# Altium PCB PCB1.PcbDoc
Units mm, origin at the board's own origin, x right, y up, seen from the top; angles counter-clockwise.
Board outline 99.69 x 59.21 mm, 2 copper layers (Top Layer, Bottom Layer), stack 0.771 mm thick; 143 components, 84 nets, 366 pads, 493 vias.
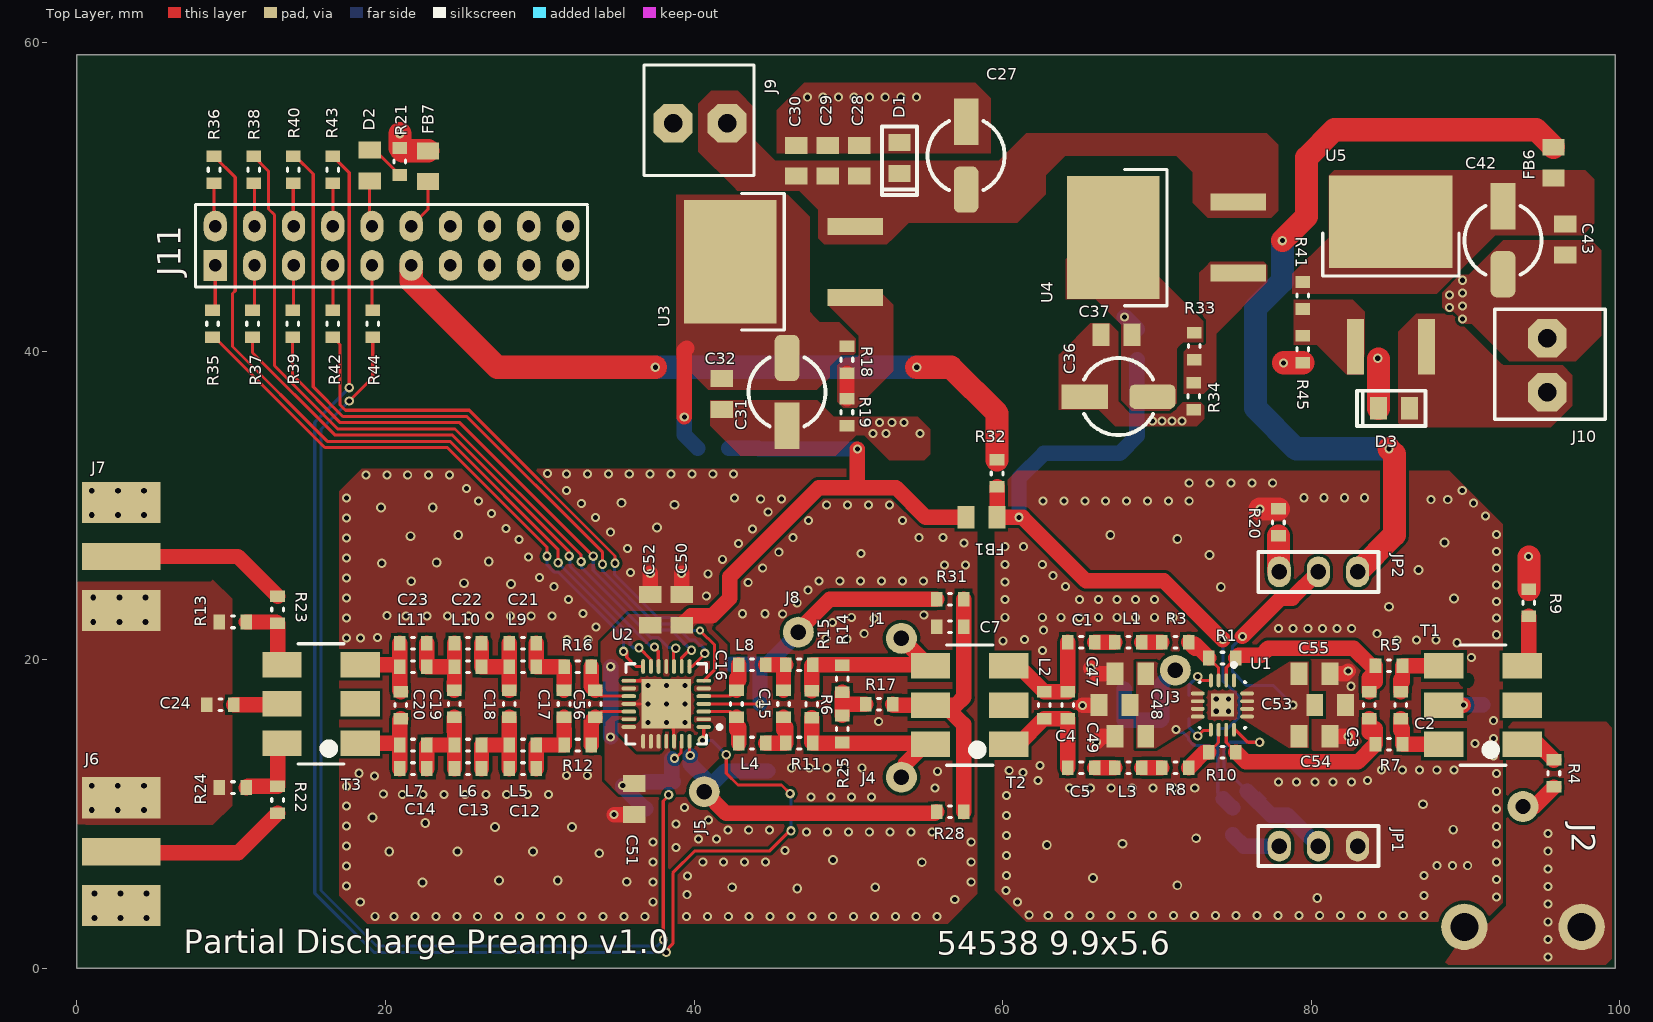
[diagram p0: Top Layer view]
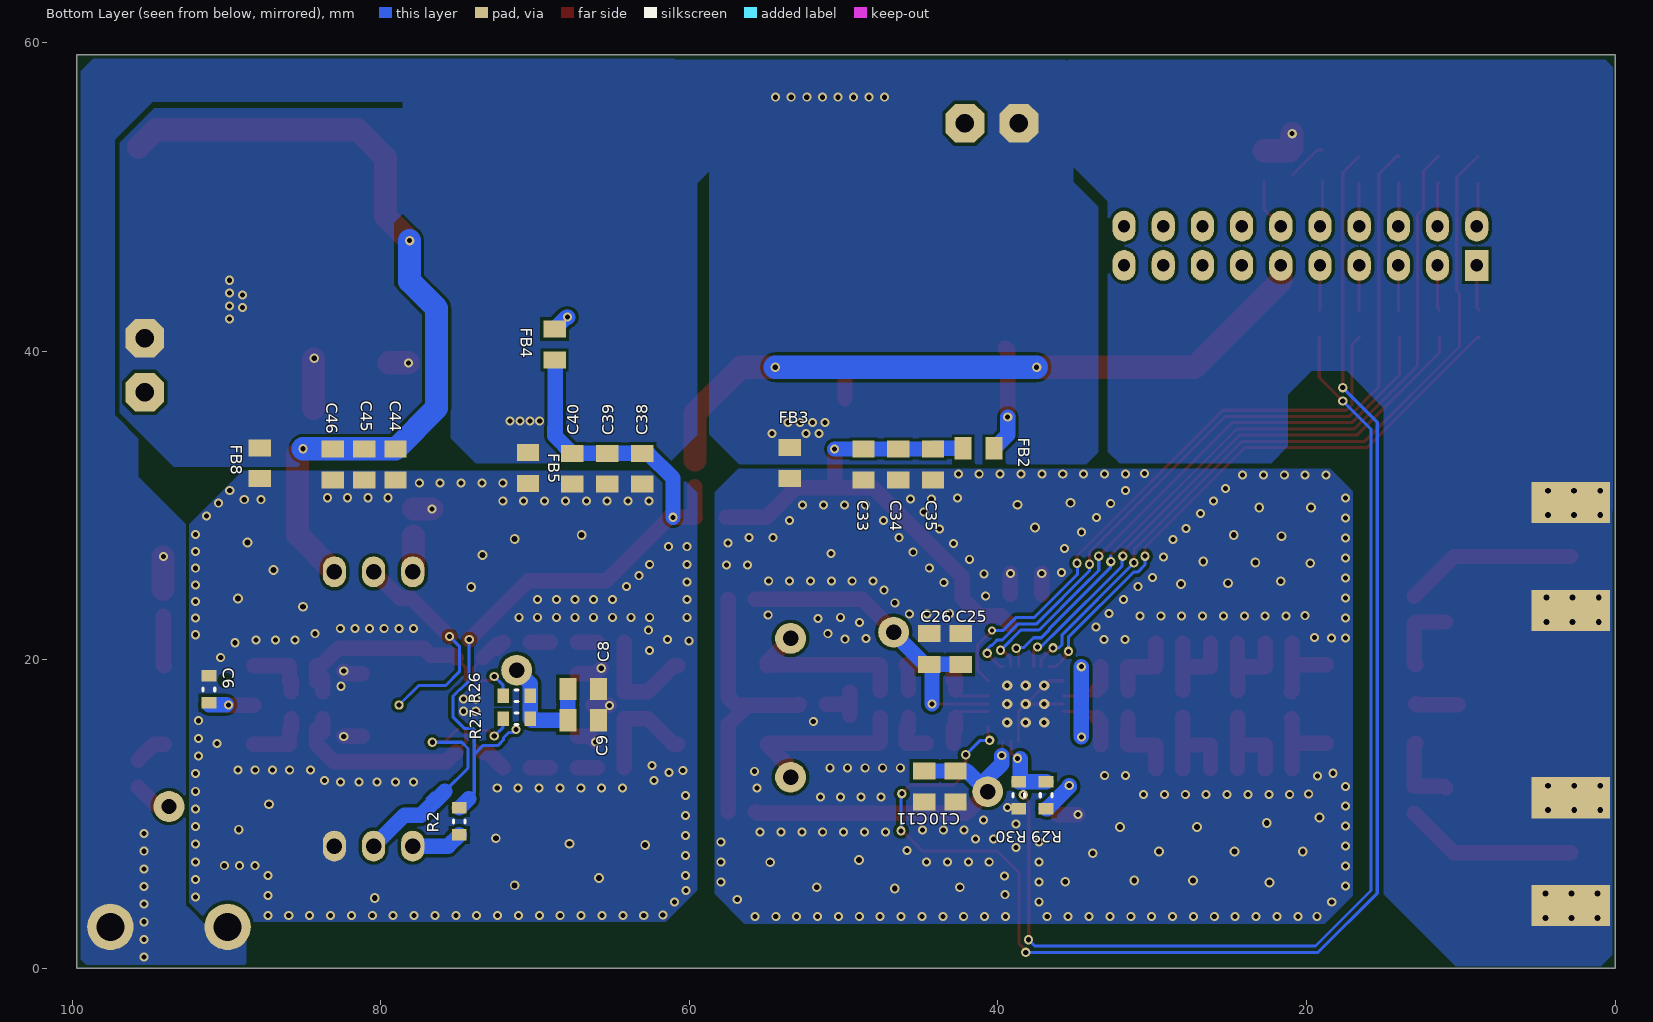
[diagram p1: Bottom Layer view, seen from below]
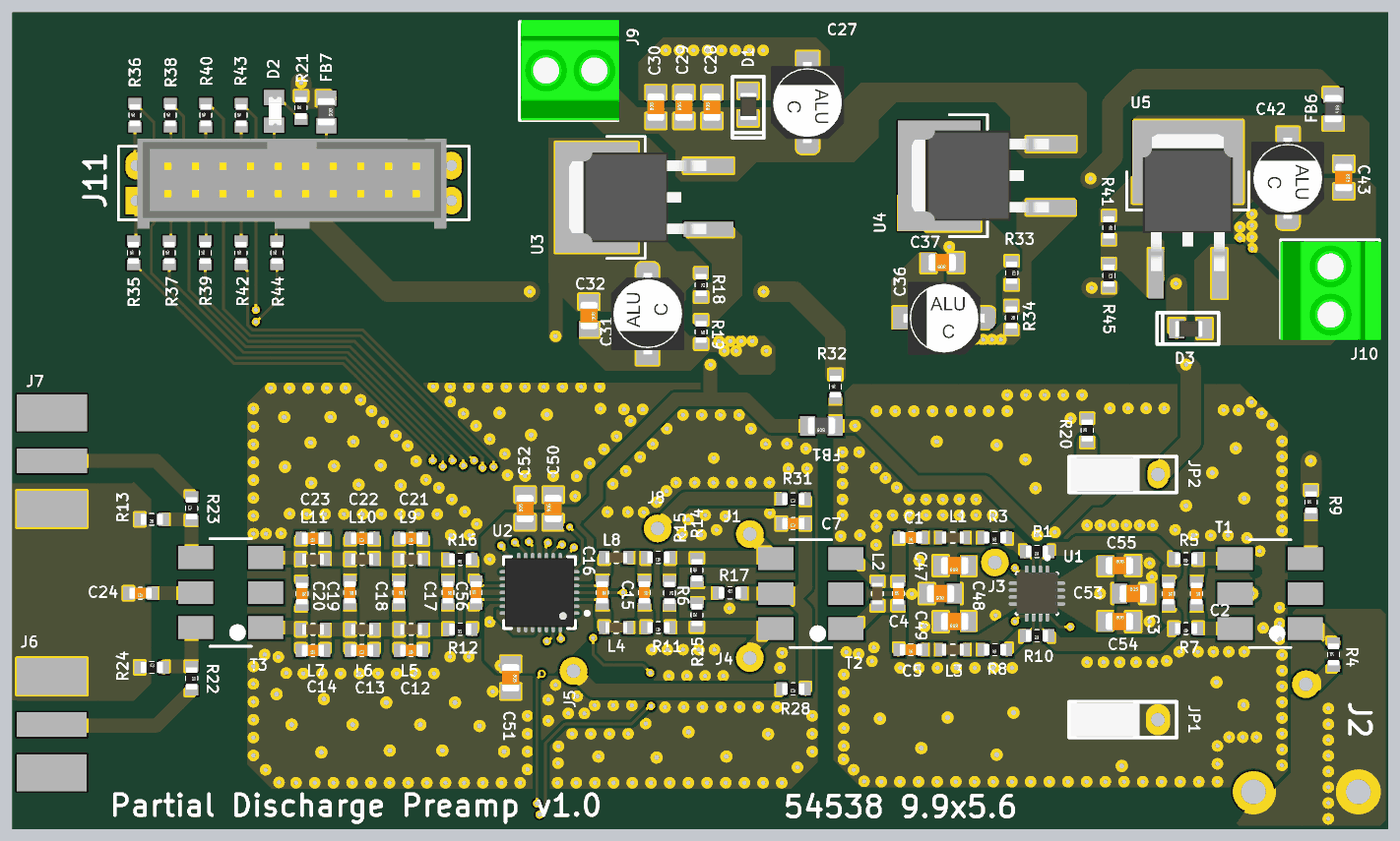
[diagram p2: 3D render of the assembled board from above, using the file's embedded part models]
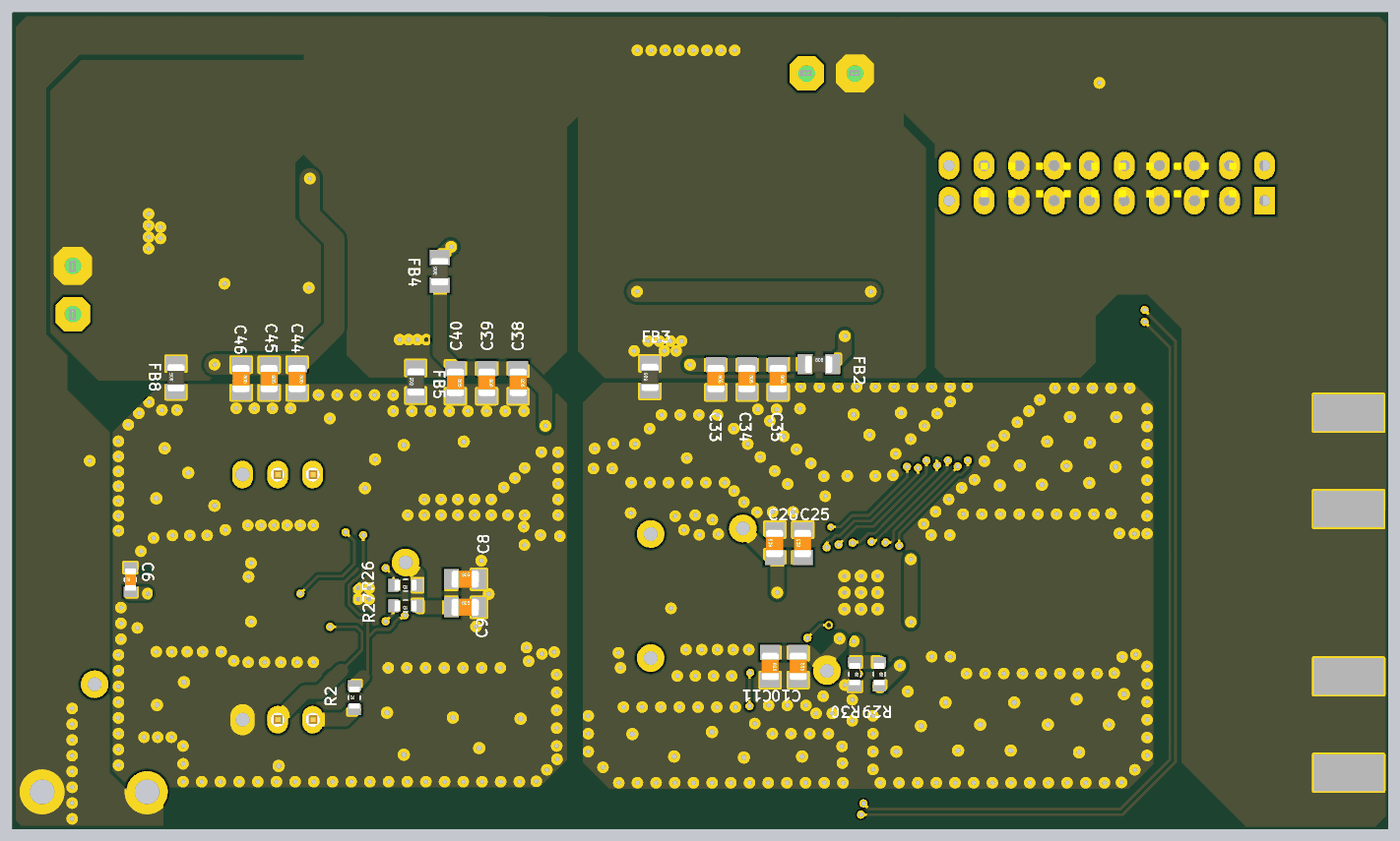
[diagram p3: 3D render of the assembled board from below, using the file's embedded part models]

## Layer stack, top to bottom
Top Layer: signal copper 0.0356
Dielectric: core 0.7, FR-4, Dk 4.8
Bottom Layer: signal copper 0.0356

## Board outline
0,0 0,59.207 99.695,59.207 99.695,0

## Design rules (kind name [scope] priority, off if disabled: settings)
Clearance [InNetClass('AMP1') vs InNamedPolygon('TOP_IMP_GND1')] p1: gap=0.203
Clearance Clearance_2 [InNetClass('AMP2') vs InNamedPolygon('TOP_GND_POLY')] p2: gap=0.203
Clearance Clearance_1 [All] p3: gap=0.203
HoleSize [All] p1: absolutevalues=TRUE maxlimit=2.54 minlimit=0.254 maxpercent=80.000 minpercent=20.000
MinimumSolderMaskSliver [All] p1: minsoldermaskwidth=0.127
PlaneConnect [All] p1: planeconnectstyle=Direct reliefexpansion=0.508 reliefentries=4 reliefconductorwidth=0.254 reliefairgap=0.254
PolygonConnect [All] p1: connectstyle=Direct reliefconductorwidth=0.254 reliefentries=4 polygonreliefangle="90 Angle"
RoutingVias [All] p1: holewidth=0.254 width=0.508 viastyle="Through Hole" minholewidth=0.254 minwidth=0.508 maxholewidth=1.27 maxwidth=1.397
SilkToSilkClearance [All] p1: silktosilkclearance=0.152
SilkscreenOverComponentPads [All] p1: minsilkscreentomaskgap=0.152
SolderMaskExpansion SolderMaskExpansion_1 [(IsVia)] p1: expansion=-1.27
SolderMaskExpansion [All] p2: expansion=0.127
Width [All] p1: maxlimit=1.778 minlimit=0.152 preferedwidth=0.254
23 further rules are at their usual default settings.

## Classes and differential pairs
component class Sheet_Amp_1: C1 C2 C3 C4 C5 C6 C7 C8 C9 C10 C11 C12 C13 C14 C15 C16 C17 C18 C19 C20 C21 C22 C23 C24 C25 C26 C47 C48 C49 C50 C51 C52 C53 C54 C55 C56 J1 J2 J3 J4 J5 J6 J7 J8 JP1 L1 L2 L3 L4 L5 L6 L7 L8 L9 L10 L11 R1 R2 R3 R4 R5 R6 R7 R8 R9 R10 R11 R12 R13 R14 R15 R16 R17 R22 R23 R24 R25 R26 R27 R28 R29 R30 R31 T1 T2 T3 U1 U2
component class Sheet_power_1: C27 C28 C29 C30 C31 C32 C33 C34 C35 C36 C37 C38 C39 C40 C42 C43 C44 C45 C46 D1 D2 D3 FB1 FB2 FB3 FB4 FB5 FB6 FB7 FB8 J9 J10 J11 JP2 R18 R19 R20 R21 R32 R33 R34 R35 R36 R37 R38 R39 R40 R41 R42 R43 R44 R45 U3 U4 U5

## Components (designator, comment, footprint, x,y, rotation, side; value= is the part's Value field where it differs from the comment)
C1 "C" C_0603 65.1,21.133 r180 top
C2 "C" C_0603 85.801,17.069 r270 top
C3 "TEST" C_0603 83.769,17.069 r270 top
C4 "C" C_0603 64.211,17.069 r90 top
C5 "C" C_0603 65.1,13.005 r180 top
C6 "C" C_0603 91.135,18.085 r90 bottom
C7 "C" C_0603 56.591,22.149 r180 top
C8 "C" C_0805 66.878,18.11 r180 bottom
C9 "C" C_0805 66.878,16.078 r180 bottom
C10 "C" C_0805 42.748,11.795 r270 bottom
C11 "C" C_0805 44.78,11.795 r270 bottom
C12 "C" C_0603 28.905,12.954 r180 top
C13 "C" C_0603 25.349,12.954 r180 top
C14 "C" C_0603 21.793,12.954 r180 top
C15 "C" C_0603 45.796,17.145 r270 top
C16 "C" C_0603 42.748,17.145 r270 top
C17 "C" C_0603 31.572,17.145 r270 top
C18 "C" C_0603 28.016,17.145 r270 top
C19 "C" C_0603 24.46,17.145 r270 top
C20 "C" C_0603 20.993,17.069 r270 top
C21 "C" C_0603 28.905,21.082 r180 top
C22 "C" C_0603 25.349,21.082 r180 top
C23 "C" C_0603 21.793,21.082 r180 top
C24 "C" C_0603 9.296,17.094 r180 top
C25 "C" C_0805 42.418,20.701 r90 bottom
C26 "C" C_0805 44.45,20.701 r90 bottom
C27 "CPOL" "C_SMD_5.0 X 5.4" 57.633,52.68 r270 top
C28 "C" C_0805 50.698,52.349 r90 top
C29 "C" C_0805 48.666,52.349 r90 top
C30 "C" C_0805 46.634,52.349 r90 top
C31 "CPOL" "C_SMD_5.0 X 5.4" 46.025,37.363 r90 top
C32 "C" C_0805 41.783,37.236 r270 top
C33 "C" C_0805 48.717,32.664 r270 bottom
C34 "C" C_0805 46.463,32.664 r270 bottom
C35 "C" C_0805 44.209,32.664 r270 bottom
C36 "CPOL" "C_SMD_5.0 X 5.4" 67.513,37.059 r0 top
C37 "C" C_0805 67.386,41.072 r180 top
C38 "C" C_0805 63.043,32.385 r270 bottom
C39 "C" C_0805 65.316,32.385 r270 bottom
C40 "C" C_0805 67.589,32.385 r270 bottom
C42 "CPOL" "C_SMD_5.0 X 5.4" 92.431,47.193 r270 top
C43 "C" C_0805 96.469,47.244 r270 top
C44 "C" C_0805 79.045,32.664 r270 bottom
C45 "C" C_0805 81.077,32.664 r270 bottom
C46 "C" C_0805 83.109,32.664 r270 bottom
C47 "C" C_0805 68.275,19.101 r180 top
C48 "C" C_0805 67.259,17.069 r180 top
C49 "C" C_0805 68.275,15.037 r180 top
C50 "C" C_0805 39.192,23.241 r90 top
C51 "C" C_0805 36.119,10.973 r270 top
C52 "C" C_0805 37.16,23.241 r90 top
C53 "C" C_0805 81.229,17.069 r0 top
C54 "C" C_0805 80.213,15.037 r0 top
C55 "C" C_0805 80.213,19.101 r0 top
C56 "C" C_0603 33.604,17.145 r90 top
D1 "D" DZENER_0805 53.315,52.527 r90 top
D2 "LED" LED_0805 18.974,52.04 r90 top
D3 "D" DZENER_0805 85.369,36.297 r0 top
FB1 "Ferrita" R_0805 58.623,29.235 r180 top
FB2 "Ferrita" R_0805 41.25,33.706 r180 bottom
FB3 "Ferrita" R_0805 53.492,32.766 r90 bottom
FB4 "Ferrita" R_0805 68.732,40.437 r90 bottom
FB5 "Ferrita" R_0805 70.46,32.432 r90 bottom
FB6 "Ferrita" R_0805 95.707,52.222 r270 top
FB7 "Ferrita" R_0805 22.758,51.993 r270 top
FB8 "Ferrita" R_0805 87.833,32.741 r90 bottom
J1 "TEST POINT" TEST_POINT 53.442,21.387 r0 top
J2 "Input" BNC 93.726,2.692 r180 top
J3 "TEST POINT" TEST_POINT 71.196,19.329 r180 top
J4 "TEST POINT" TEST_POINT 53.442,12.395 r0 top
J5 "TEST POINT" TEST_POINT 40.665,11.455 r0 top
J6 "Output" SMA 2.87,7.569 r270 top
J7 "Output" SMA 2.874,26.695 r90 top
J8 "TEST POINT" TEST_POINT 46.761,21.793 r0 top
J9 "Power VS+" BORNA_PT_2 40.386,54.788 r270 top
J10 "Power VS-" BORNA_PT_2 95.301,39.091 r180 top
J11 "Header 2x10" PINS_10_DOBLE 8.966,45.568 r90 top
JP1 "SHUNT" JUMPER_2,54_3 80.467,7.925 r0 top
JP2 "SHUNT" JUMPER_2,54_3 80.467,25.705 r0 top
L1 "L" L_0603 68.148,21.133 r180 top
L2 "TEST" L_0603 62.687,17.069 r270 top
L3 "L" L_0603 68.148,13.005 r180 top
L4 "L" L_0603 43.764,14.605 r180 top
L5 "L" L_0603 28.905,14.478 r180 top
L6 "L" L_0603 25.349,14.478 r180 top
L7 "L" L_0603 21.793,14.478 r180 top
L8 "L" L_0603 43.764,19.685 r180 top
L9 "L" L_0603 28.905,19.558 r180 top
L10 "L" L_0603 25.349,19.558 r180 top
L11 "L" L_0603 21.793,19.558 r180 top
R1 "R" R_0603 74.244,20.117 r180 top
R2 "R" R_0603 74.905,9.525 r90 bottom
R3 "R" R_0603 71.196,21.133 r180 top
R4 "TEST" R_0603 95.733,12.649 r90 top
R5 "R" R_0603 85.039,19.609 r180 top
R6 "TEST" R_0603 47.625,17.12 r270 top
R7 "R" R_0603 85.039,14.529 r180 top
R8 "R" R_0603 71.196,13.005 r180 top
R9 "TEST" R_0603 94.107,23.698 r90 top
R10 "R" R_0603 74.244,14.021 r180 top
R11 "TEST" R_0603 46.812,14.605 r180 top
R12 "R" R_0603 32.461,14.478 r180 top
R13 "TEST" R_0603 10.109,22.454 r180 top
R14 "TEST" R_0603 49.606,18.771 r90 top
R15 "TEST" R_0603 46.812,19.685 r180 top
R16 "R" R_0603 32.461,19.558 r180 top
R17 "TEST" R_0603 51.994,17.12 r0 top
R18 "R" R_0603 49.911,39.446 r270 top
R19 "R" R_0603 49.911,36.043 r270 top
R20 "R" R_0603 77.876,28.905 r90 top
R21 "R" R_0603 20.93,52.299 r90 top
R22 "TEST" R_0603 13.005,10.922 r270 top
R23 "TEST" R_0603 13.005,23.254 r90 top
R24 "TEST" R_0603 10.109,11.722 r0 top
R25 "TEST" R_0603 49.606,15.519 r90 top
R26 "R" R_0603 71.196,17.678 r0 bottom
R27 "R" R_0603 71.196,16.18 r0 bottom
R28 "TEST" R_0603 56.591,10.16 r180 top
R29 "" R_0603 36.881,11.227 r270 bottom
R30 "" R_0603 38.659,11.227 r270 bottom
R31 "TEST" R_0603 56.591,23.935 r180 top
R32 "R" R_0603 59.639,32.08 r90 top
R33 "R" R_0603 72.415,40.335 r270 top
R34 "R" R_0603 72.39,37.084 r270 top
R35 "R" R_0603 8.788,41.783 r90 top
R36 "R" R_0603 8.89,51.765 r90 top
R37 "R" R_0603 11.386,41.783 r90 top
R38 "R" R_0603 11.455,51.765 r90 top
R39 "R" R_0603 13.983,41.783 r90 top
R40 "R" R_0603 14.021,51.765 r90 top
R41 "R" R_0603 79.451,43.612 r270 top
R42 "R" R_0603 16.58,41.783 r90 top
R43 "R" R_0603 16.586,51.765 r90 top
R44 "R" R_0603 19.177,41.783 r90 top
R45 "R" R_0603 79.451,40.132 r270 top
T1 "Transformer_center_tab" TRASFORMADOR_2.54 91.135,17.069 r180 top
T2 "Transformer_center_tab" TRASFORMADOR_2.54 57.861,17.069 r180 top
T3 "Transformer_center_tab" TRASFORMADOR_2.54 15.824,17.145 r180 top
U1 "THS4509" QFN_16 74.244,17.069 r270 top
U2 "PGA870" QFN_28 38.202,17.145 r180 top
U3 "VOLTAGE_REGULATOR_3" REG_DPAK 44.348,45.796 r180 top
U4 "VOLTAGE_REGULATOR_3" REG_DPAK 69.164,47.371 r180 top
U5 "VOLTAGE_REGULATOR_3" REG_DPAK 85.166,46.38 r90 top

## Footprints (in the part's own frame and the unit in brackets; to place one, negate y for a bottom-side part, rotate by r counter-clockwise, add the part's x,y. Pads: shape width x height; smd on the part's side, far side on the other; paste and mask are expansions set on the pad)
BNC [mm]
  round 2 hole 1: 1(0,-7.8)
  round 3 hole 1.8: 2(-3.8,0) 2(3.8,0)
BORNA_PT_2 [mm]
  oct 2.5x2.5 hole 1.2: 1(0,1.75) 2(0,-1.75)
  silkscreen extent -3.76,-3.63 3.4,3.5, body extent -3.86,-3.51 3.43,3.6, height 8.51
C_0603 [mm] "Chip Resistor, 2-Leads, Body 1.6x0.8mm, IPC Medium Density"
  rect 0.75x0.95 smd: 1(-0.875,0) 2(0.875,0)
  silkscreen extent -0.1,-0.38 0.1,0.38, body extent -0.8,-0.4 0.8,0.4, height 0.3
C_0805 [mm] "Chip Capacitor, 2-Leads, Body 2,0x1,3mm, IPC Medium Density"
  rect 1.1x1.45 smd: 1(-1,0) 2(1,0)
  body extent -1,-0.63 1,0.63, height 0.78
"C_SMD_5.0 X 5.4" [mm]
  rect 3x1.6 smd: 1(-2.2,0)
  rrect50% 3x1.6 smd: 2(2.2,0)
  silkscreen extent -2.24,-2.5 2.24,2.5, body extent -2.95,-2.67 2.95,2.63, height 5.41
DZENER_0805 [mm]
  rect 1.1x1.45 smd: A(1,0) K(-1,0)
  silkscreen extent -2.41,-1.14 2.03,1.14, body extent -1.13,-0.64 0.87,0.57, height 1.22
JUMPER_2,54_3 [mm]
  oval 1.5x2 hole 1: 1(-2.54,0) 2(0,0) 3(2.54,0)
  silkscreen extent -3.9,-1.3 3.9,1.3, body extent -3.8,-1.27 1.2,1.27, height 9.5
L_0603 [mm] "Chip Resistor, 2-Leads, Body 1.6x0.8mm, IPC Medium Density"
  rect 0.75x0.95 smd: 1(-0.875,0) 2(0.875,0)
  silkscreen extent -0.1,-0.38 0.1,0.38, body extent -0.8,-0.4 0.8,0.4, height 0.8
LED_0805 [mm]
  rect 1.1x1.45 smd: A(-1,0) K(1,0)
  body extent -1.03,-0.53 1.03,0.38, height 0.85
PINS_10_DOBLE [mm]
  rect 2x1.5 hole 0.8: 1(0,0)
  oval 2x1.5 hole 0.8: 2(2.54,0) 3(0,-2.54) 4(2.54,-2.54) 5(0,-5.08) 6(2.54,-5.08) 7(0,-7.62) 8(2.54,-7.62) 9(0,-10.16) 10(2.54,-10.16) 11(0,-12.7) 12(2.54,-12.7) 13(0,-15.24) 14(2.54,-15.24) 15(0,-17.78) 16(2.54,-17.78) 17(0,-20.32) 18(2.54,-20.32) 19(0,-22.86) 20(2.54,-22.86)
  silkscreen extent -1.4,-24.13 3.94,1.27, body extent -2.03,-22.49 4.51,-0.11, height 4.41
QFN_16 [mm] "QFN, 16-Leads, Body 2.8x2.8mm (max), Pitch 0.50mm, IPC Medium Density"
  oval 0.9x0.25 smd mask+0: 1(-1.6,0.75) 2(-1.6,0.25) 3(-1.6,-0.25) 4(-1.6,-0.75) 9(1.6,-0.75) 10(1.6,-0.25) 11(1.6,0.25) 12(1.6,0.75)
  oval 0.25x0.9 smd mask+0: 5(-0.75,-1.6) 6(-0.25,-1.6) 7(0.25,-1.6) 8(0.75,-1.6) 13(0.75,1.6) 14(0.25,1.6) 15(-0.25,1.6)
  oval 0.25x0.9 smd paste+0 mask+0: 16(-0.75,1.6)
  rect 1.5x1.5 smd mask+0: 17(0,0)
  silkscreen extent -2.72,-1.53 1.53,1.52, body extent -1.54,-1.5 1.5,1.54, height 0.9
QFN_28 [mm] "QFN, 28-Leads, Body 5.2x5.2mm (max), Pitch 0.50mm, IPC Medium Density"
  oval 0.95x0.25 smd mask+0: 1(-2.425,1.5) 2(-2.425,1) 3(-2.425,0.5) 4(-2.425,0) 5(-2.425,-0.5) 6(-2.425,-1) 7(-2.425,-1.5) 15(2.425,-1.5) 16(2.425,-1) 17(2.425,-0.5) 18(2.425,0) 19(2.425,0.5) 20(2.425,1) 21(2.425,1.5)
  oval 0.25x0.95 smd mask+0: 8(-1.5,-2.425) 9(-1,-2.425) 10(-0.5,-2.425) 11(0,-2.425) 12(0.5,-2.425) 13(1,-2.425) 14(1.5,-2.425) 22(1.5,2.425) 23(1,2.425) 24(0.5,2.425) 25(0,2.425) 26(-0.5,2.425) 27(-1,2.425) 28(-1.5,2.425)
  rect 3.2x3.2 smd mask+0: 29(0,0)
  silkscreen extent -3.57,-2.6 2.6,2.6, body extent -2.52,-2.52 2.52,2.52, height 0.9
R_0603 [mm] "Chip Resistor, 2-Leads, Body 1.6x0.8mm, IPC Medium Density"
  rect 0.75x0.95 smd: 1(-0.875,0) 2(0.875,0)
  silkscreen extent -0.1,-0.38 0.1,0.38, body extent -0.8,-0.4 0.8,0.4, height 0.3
R_0805 [mm] "Chip Resistor Body 2,0x1,3mm, IPC Medium Density"
  rect 1.1x1.45 smd: 1(-1,0) 2(1,0)
  body extent -1.02,-0.64 0.98,0.62, height 0.78
REG_DPAK [mm]
  rect 3.6x1.1 smd: GND(-6.1,2.3) IN(-6.1,-2.3)
  rect 6x8 smd: OUT(2,0)
  silkscreen extent -1.5,-4.42 1.27,4.42, body extent -5.93,-3.28 4,3.26, height 2.34
SMA [mil]
  rect 70x200 smd: 1(0,0)
  rect 105x200 smd: 2(-137.5,0) 2(137.5,0)
  rect 105x200 smd far side: 2(-137.5,0) 2(137.5,0)
TEST_POINT [mm]
  round 2 hole 1: 1(0,0)
TRASFORMADOR_2.54 [mm] "SOP, 6-Leads, Body 7.8x5.6mm (max), Pitch 2.54mm, IPC Medium Density"
  rect 2.54x1.65 smd: 1(-2.54,2.54) 2(-2.54,0) 3(-2.54,-2.54) 4(2.54,-2.54) 5(2.54,0) 6(2.54,2.54)
  silkscreen extent -1.5,-3.9 1.5,3.9, body extent -2.8,-3.9 2.8,3.9, height 2.65

## Part data
C3: library part C
J9 J10: library part BORNA_2
L2: library part L
R4 R6 R9 R11 R13 R14 R15 R17 R22 R23 R24 R25 R28 R29 R30 R31: library part R

## Free pads (board coordinates)
  round 0.6 hole 0.333: 0(78.816,17.069)

## Via types
v1: diameter 0.584, hole 0.33, Top Layer to Bottom Layer, 354 vias
v2: diameter 0.635, hole 0.381, Top Layer to Bottom Layer, 70 vias
v3: diameter 0.6, hole 0.333, Top Layer to Bottom Layer, 54 vias
v4: diameter 0.66, hole 0.33, Top Layer to Bottom Layer, tented top, 9 vias
v5: diameter 0.6, hole 0.33, Top Layer to Bottom Layer, tented top, 4 vias
v6: diameter 0.6, hole 0.33, Top Layer to Bottom Layer, 1 vias
v7: diameter 0.508, hole 0.254, Top Layer to Bottom Layer, 1 vias

## Nets (pads, with @x,y where several pads share a name; then routed paths per layer and width w, separated by ;. In a path a pad name is that pad's centre, name@x,y a point inside that pad or via, vN(x,y) a via of type N, cw(c..) or ccw(c..) an arc to the next point about the centre after c; other vN are vias at no path point)
AMP1+: J4.1 R6.2 R11.1 R25.1 T2.6 | length 11.4
  Top Layer w1: R11.1@47.625,14.667 R6.2 ; R11.1 T2.6@54.885,14.605 ; J4.1@53.696,12.395 53.696,13.263 T2.6@54.961,14.529
AMP1-: J1.1 R6.1 R14.2 R15.1 T2.4 | length 11.4
  Top Layer w1: R6.1 47.625,19.623 R15.1 54.885,19.685 54.961,19.609 54.961,19.867 J1.1
B0: R35.1 U2.14 | length 38
  Top Layer w0.2: R35.1 8.915,40.908 16.067,33.757 24.009,33.757 30.464,27.302 v3(30.464,26.721) ; v3@35.636,20.574 35.636,20.168 36.234,19.57 U2.14@36.676,19.57
  Bottom Layer w0.2: v3(30.464,26.721) 30.464,26.163 30.941,25.686 31.21,25.686 35.433,21.463 v3(35.433,20.549)
B1: R36.2 U2.13 | length 49.8
  Top Layer w0.2: R36.2 10.262,51.269 10.262,43.917 10.084,43.739 10.084,40.31 16.234,34.16 24.176,34.16 31.191,27.145 v3(31.191,26.289) ; v3(36.424,20.777) 36.45,20.777 37.202,20.026 U2.13
  Bottom Layer w0.2: v3@31.214,26.252 35.836,21.63 35.836,20.998 36.057,20.777 v3(36.424,20.777)
B2: R37.1 U2.12 | length 36.9
  Top Layer w0.2: R37.1 11.386,39.913 16.735,34.563 24.343,34.563 31.902,27.004 v3(31.902,26.721) ; v3(37.44,20.828) 37.44,20.803 37.676,20.566 U2.12@37.676,19.57
  Bottom Layer w0.2: v3(31.902,26.721) 31.964,26.721 31.964,26.073 36.481,21.555 36.499,21.555 37.226,20.828 v3(37.44,20.828)
B3: R38.2 U2.10 | length 50.1
  Top Layer w0.2: R38.2 12.421,51.675 12.421,49.225 12.802,48.844 12.802,39.067 16.902,34.966 24.51,34.966 32.683,26.793 v3(32.683,26.366) ; U2.10@38.676,19.57 v3@38.676,20.617
  Bottom Layer w0.2: v3(32.683,26.366) 32.683,26.69 32.714,26.721 32.714,25.974 36.666,22.021 36.666,21.958 37.193,21.431 37.689,21.431 38.318,20.803 38.862,20.803 v3(38.811,20.752)
B4: R39.1 U2.9 | length 38
  Top Layer w0.2: R39.1 13.983,38.456 17.069,35.37 24.815,35.37 v3(33.464,26.721) v3@33.464,26.749 ; U2.9@39.176,19.57 39.176,20.101 39.853,20.777 39.853,20.65 v3(39.827,20.625)
  Bottom Layer w0.2: v3(33.464,26.721) 33.464,25.794 34.531,24.727 37.326,21.931 38.511,21.931 39.665,20.777 39.853,20.777 39.853,20.65 v3(39.827,20.625)
B5: R40.2 U2.8 | length 50.6
  Top Layer w0.2: R40.2 14.162,52.64 15.316,51.486 15.316,37.693 17.236,35.773 25.265,35.773 34.071,26.967 v3(34.071,26.192) ; U2.8@39.676,19.57 39.89,19.57 40.742,20.422 v3(40.691,20.422)
  Bottom Layer w0.2: v3(34.071,26.192) 34.071,25.757 37.493,22.335 38.678,22.335 39.739,21.274 40.08,21.274 40.08,21.252 40.4,20.933 40.475,20.933 40.767,20.641 40.767,20.447 40.742,20.422 v3(40.691,20.422)
CM: C7.1 R17.2 R28.1 R31.1 T2.5 | length 18.6
  Top Layer w1: R17.2 52.92,17.069 54.961,17.069 T2.5@56.21,17.069 ; R28.1 57.466,15.813 T2.5@56.21,17.069 ; R31.1 C7.1 57.466,17.591 57.48,17.577 56.972,17.069 T2.5@56.21,17.069
D\I\S\A\B\L\E\: R29.1 R30.1 R44.1 U2.27 | length 77.9
  Top Layer w0.2: v3(17.653,36.779) 19.177,38.303 R44.1 ; v3(38.024,1.854) 38.004,1.874 38.004,10.851 v3@38.354,11.201 ; v3(38.735,13.614) 38.786,13.614 39.15,13.979 39.15,14.694 U2.27@39.176,14.72
  Bottom Layer w0.2: v3(17.653,36.779) 15.819,34.945 15.819,5.046 19.417,1.448 37.617,1.448 v3(38.024,1.854) ; v3@38.354,11.201 v3(38.354,11.252) 38.354,11.797 R30.1 38.786,12.229 38.786,13.614 v3(38.735,13.614)
  Bottom Layer w1: R29.1 R30.1 38.55,12.21 v3@38.55,13.589
GND: C7.2 C10.2 C11.2 C25.2 C26.2 C33.2 C34.2 C35.2 C50.2 C51.2 C52.2 FB3.1 R30.2 U2.15 U2.18 U2.21 U2.22 U2.23 U2.24 U2.26 U2.29 | length 12.1
  Top Layer w0.2: U2.18@35.751,17.145 U2.29@38.176,17.145 ; U2.15@35.751,18.645 36.676,18.645 U2.29@38.176,17.145 ; U2.26@38.676,14.72 38.676,16.645 U2.29@38.176,17.145
  Top Layer w1: v3(34.814,9.973) C51.2 ; C52.2 v3(37.16,25.603) ; C50.2 v3(39.192,25.603)
  other v1: 20.563,3.353 21.917,3.353 23.27,3.353 24.623,3.353 25.977,3.353 27.33,3.353 28.684,3.353 30.037,3.353 31.391,3.353 32.744,3.353 34.098,3.353 35.451,3.353 36.805,3.353 39.512,3.353 40.865,3.353 42.218,3.353 43.572,3.353 44.925,3.353 46.279,3.353 47.632,3.353 48.986,3.353 50.339,3.353 51.693,3.353 53.046,3.353 54.4,3.353 55.753,3.353 19.329,3.378 18.364,4.293 37.338,4.318 56.896,4.47 39.548,4.775 17.475,5.334 37.338,5.613 57.963,5.613 39.573,5.994 17.475,6.629 37.338,6.909 40.564,6.909 41.917,6.909 43.271,6.909 44.624,6.909 57.963,6.909 45.898,7.645 38.837,7.849 17.475,7.925 37.338,8.204 57.963,8.204 40.284,8.382 41.453,8.382 47.295,8.839 48.648,8.839 50.002,8.839 51.355,8.839 52.709,8.839 54.062,8.839 55.416,8.839 42.189,8.966 43.543,8.966 44.896,8.966 17.475,9.22 38.837,9.373 40.945,9.627 39.37,10.439 17.475,10.516 47.574,11.1 48.887,11.1 50.199,11.1 51.511,11.1 21.089,11.278 22.443,11.278 23.796,11.278 25.15,11.278 26.503,11.278 27.857,11.278 29.21,11.278 30.563,11.278 19.856,11.303 55.626,11.684 17.475,11.786 19.279,12.471 31.725,12.497 33.078,12.497 18.288,12.649 55.778,12.776 46.33,13.005 47.466,13.005 48.603,13.005 49.74,13.005 50.876,13.005 51.968,16.002 31.768,21.311 33.122,21.311 49.911,21.336 48.539,21.387 17.475,21.412 18.39,21.412 19.482,21.438 51.029,21.692 33.655,22.123 48.971,22.428 51.664,22.682 17.475,22.708 50.216,22.758 21.325,22.835 22.679,22.835 24.032,22.835 25.385,22.835 26.739,22.835 28.092,22.835 29.446,22.835 30.799,22.835 20.091,22.86 54.889,22.911 45.745,22.962 43.129,22.987 44.602,22.987 32.791,23.012 46.685,23.698 31.852,23.901 17.475,24.003 40.792,24.13 47.396,24.511 30.912,24.74 43.51,25.019 48.089,25.121 49.443,25.121 50.796,25.121 52.15,25.121 53.503,25.121 54.857,25.121 17.475,25.298 29.972,25.324 40.894,25.578 35.89,25.654 44.45,25.959 56.232,26.137 57.585,26.137 41.834,26.518 17.475,26.594 29.261,26.67 50.825,26.899 45.491,26.975 35.687,27.203 42.875,27.534 57.506,27.584 28.651,27.788 17.475,27.889 46.406,27.915 54.585,27.915 56.134,27.94 34.595,28.27 43.79,28.473 27.813,28.524 47.422,29.032 53.518,29.032 17.475,29.185 33.604,29.235 26.873,29.489 44.806,29.591 48.597,30.023 49.951,30.023 51.304,30.023 52.658,30.023 32.69,30.124 26.035,30.302 44.319,30.429 45.673,30.429 17.475,30.48 42.621,30.48 31.739,30.988 25.248,31.115 18.734,31.979 20.088,31.979 21.441,31.979 22.795,31.979 24.148,31.979 31.739,32.055 33.093,32.055 34.446,32.055 35.799,32.055 37.153,32.055 38.506,32.055 39.86,32.055 41.213,32.055 42.567,32.055 30.505,32.08
  other v2: 46.685,5.182 42.469,5.258 51.74,5.258 22.403,5.563 35.636,5.613 27.356,5.69 31.166,5.69 54.762,6.883 48.997,7.036 33.858,7.468 20.244,7.569 24.663,7.569 29.566,7.569 27.102,9.169 32.08,9.169 22.581,9.423 19.152,9.779 28.143,24.917 25.095,24.968 21.666,25.095 19.761,26.264 23.317,26.314 26.695,26.365 21.615,28.016 24.714,28.092 37.592,28.575 19.71,29.87 23.063,29.87 38.735,30.048 35.306,30.175
  other v4: 37.002,15.945 38.202,15.945 39.402,15.945 37.002,17.145 38.202,17.145 39.402,17.145 37.002,18.345 38.202,18.345 39.402,18.345
GND1: C6.2 C8.2 C9.2 C38.2 C39.2 C40.2 C44.2 C45.2 C46.2 C47.2 C48.2 C49.2 C53.2 C54.2 C55.2 FB5.1 FB8.1 JP1.3 R20.2 U1.17 | length 7.7
  Top Layer w1: v3@65.202,17.069 C48.2 ; v3(65.71,19.456) 66.065,19.101 C47.2 ; v3(66.091,14.681) 66.446,15.037 C49.2 ; C54.2 v3(82.398,15.037) ; C55.2 82.22,19.101 v3(82.398,19.279)
  Top Layer w1.5: v3(76.683,29.769) 76.694,29.78 R20.2
  other v1: 62.956,3.429 64.309,3.429 65.663,3.429 67.016,3.429 68.37,3.429 69.723,3.429 71.076,3.429 72.43,3.429 73.783,3.429 75.137,3.429 76.49,3.429 77.844,3.429 79.197,3.429 80.551,3.429 81.904,3.429 83.258,3.429 84.611,3.429 85.964,3.429 87.318,3.429 61.722,3.454 60.96,4.293 91.999,4.623 87.318,4.724 60.223,5.055 91.999,5.766 60.249,6.02 87.318,6.02 88.163,6.655 89.154,6.655 90.145,6.655 91.999,6.909 60.249,7.315 91.999,8.052 60.249,8.611 91.999,9.195 60.249,9.906 91.999,10.338 60.249,11.201 91.999,11.481 64.331,11.684 65.684,11.684 67.038,11.684 68.391,11.684 69.745,11.684 71.098,11.684 72.452,11.684 77.876,12.09 79.057,12.09 80.239,12.09 81.42,12.09 82.601,12.09 62.281,12.167 83.642,12.192 91.999,12.624 61.316,12.7 60.427,12.827 84.557,12.852 85.903,12.852 87.02,12.852 88.138,12.852 89.256,12.852 62.433,13.157 91.821,13.767 90.627,14.58 91.821,14.91 91.821,16.053 90.373,20.142 62.586,20.599 89.459,21.107 60.02,21.234 85.573,21.285 86.83,21.285 88.087,21.285 61.417,21.311 91.999,21.626 84.252,21.692 62.636,21.92 77.876,22.022 78.826,22.022 79.776,22.022 80.726,22.022 81.676,22.022 82.626,22.022 91.999,22.704 60.147,22.758 62.569,22.758 63.779,22.758 64.99,22.758 66.201,22.758 67.412,22.758 68.622,22.758 69.833,22.758 71.044,22.758 91.999,23.782 60.147,23.901 64.99,23.901 66.201,23.901 67.412,23.901 68.622,23.901 69.833,23.901 64.084,24.765 91.999,24.859 60.147,25.044 63.271,25.451 91.999,25.937 60.147,26.187 62.569,26.187 91.999,27.015 60.147,27.33 61.358,27.33 91.999,28.118 91.288,29.312 90.526,30.15 62.618,30.302 63.972,30.302 65.325,30.302 66.679,30.302 68.032,30.302 69.386,30.302 70.739,30.302 72.092,30.302 87.757,30.378 88.849,30.378 79.527,30.505 80.84,30.505 82.152,30.505 83.464,30.505 89.789,30.963 72.092,31.471 73.446,31.471 74.799,31.471 76.153,31.471 77.506,31.471
  other v2: 80.391,4.572 71.323,5.385 65.862,5.867 62.865,8.001 67.767,8.077 72.542,8.433 89.205,8.992 87.249,10.643 85.039,23.444 89.256,23.978 74.143,24.714 86.944,25.832 73.406,26.797 88.646,27.61 71.323,27.838 66.98,28.092
  other v3: 65.176,17.043 82.575,18.288
  other v5: 73.844,16.669 74.644,16.669 73.844,17.469 74.644,17.469
GND3: C24.2 C27.1 C28.2 C29.2 C30.2 C31.1 C32.2 C36.1 C37.2 C42.2 C43.2 D1.A D3.K FB3.2 FB5.2 FB7.1 FB8.2 J2.2 J6.2 J7.2 J9.2 J10.2 R9.2 R13.2 R19.2 R21.2 R24.1 R34.2 R45.2 | length 9.4
  Top Layer w1.5: v3(20.93,54.102) R21.2 21.11,52.993 FB7.1 ; v3@78.221,39.257 R45.2 ; D3.K v3@84.369,39.495 ; R9.2 v3@94.107,26.67
  other v1: 95.352,0.737 95.352,1.88 95.352,3.023 95.352,4.166 95.352,5.309 95.352,6.452 95.352,7.595 95.352,8.738 51.587,34.671 52.451,34.671 54.635,34.671 51.206,35.382 52.011,35.382 52.815,35.382 53.619,35.382 69.698,35.484 70.341,35.484 70.985,35.484 71.628,35.484 89.814,42.088 88.951,42.824 89.814,42.926 88.951,43.637 89.814,43.764 89.814,44.602 47.346,56.464 48.354,56.464 49.363,56.464 50.372,56.464 51.381,56.464 52.389,56.464 53.398,56.464 54.407,56.464
  other v2: 1.139,3.277 2.828,3.277 4.517,3.277 1.139,4.851 2.828,4.851 4.517,4.851 0.961,10.262 2.65,10.262 4.339,10.262 0.961,11.836 2.65,11.836 4.339,11.836 1.063,22.454 2.752,22.454 4.441,22.454 1.063,24.028 2.752,24.028 4.441,24.028 0.965,29.388 2.654,29.388 4.343,29.388 0.965,30.963 2.654,30.963 4.343,30.963
  other v3: 94.082,26.695 78.207,39.243 84.316,39.548
LATCH: R43.2 U2.1 | length 98.9
  Top Layer w0.2: R43.2 17.653,51.573 v3(17.653,37.643) ; v3(38.202,1.041) 38.202,1.179 38.627,1.604 38.627,6.191 40.056,7.62 44.907,7.62 46.203,8.915 v3(46.279,8.915) ; v3(40.538,14.783) 40.627,14.871 U2.1 ; v3(42.084,13.848) 42.084,12.653 42.85,11.887 45.669,11.887 v3(46.228,11.328) ; v3@46.177,11.176 v3@46.228,11.176
  Bottom Layer w0.2: v3(17.653,37.643) 17.653,37.632 15.415,35.395 15.415,4.879 19.253,1.041 v3(38.202,1.041) ; v3(40.538,14.783) 41.15,14.783 v3(42.084,13.848) ; v3@46.177,11.176 v3@46.228,11.176 ; v3@46.203,8.915 v3(46.279,8.915) 46.279,11.278 v3(46.228,11.328)
LED: D2.A J11.10 | length 3
  Top Layer w0.2: D2.A 18.974,48.26 J11.10
NetC1_1: C1.1 L1.2 | length 1.3
  Top Layer w1: C1.1 L1.2
NetC1_2: C1.2 C4.2 L2.1 T2.3 | length 7.3
  Top Layer w1: T2.3@60.761,19.609 61.022,19.609 L2.1 C4.2 64.225,17.958 C1.2
NetC2_1: C2.1 R5.1 T1.4 | length 4.3
  Top Layer w1: C2.1 85.801,18.706 85.914,18.593 R5.1 T1.4@88.235,19.609
NetC2_2: C2.2 R7.1 T1.6 | length 4.3
  Top Layer w1: C2.2 85.801,15.432 85.914,15.545 R7.1 T1.6@88.235,14.529
NetC3_1: C3.1 R1.1 R5.2 U1.2 | length 13.9
  Top Layer w0.2: U1.2 74.494,19.492 R1.1
  Top Layer w1: R1.1 75.313,20.311 76.775,20.311 77.216,20.752 82.753,20.752 83.896,19.609 R5.2 84.164,18.593 83.91,18.847 83.769,18.847 C3.1
NetC3_2: C3.2 R7.2 R10.1 U1.11 | length 13.9
  Top Layer w0.2: U1.11 74.494,14.646 R10.1
  Top Layer w1: R10.1 75.133,14.021 75.768,13.386 83.021,13.386 R7.2 84.164,15.545 83.91,15.291 83.769,15.291 C3.2
NetC4_1: C4.1 C5.2 L2.2 T2.1 | length 7.3
  Top Layer w1: T2.1@60.761,14.529 61.022,14.529 L2.2 C4.1 64.225,16.18 C5.2
NetC5_1: C5.1 L3.2 | length 1.3
  Top Layer w1: C5.1 L3.2
NetC6_1: C6.1 T1.5 | length 2.8
  Top Layer w1: T1.5@88.235,17.069 v6(89.865,17.069)
  Bottom Layer w1: v6@90.006,17.083 C6.1@91.135,17.083
NetC8_1: C8.1 C9.1 J3.1 R26.1 R27.1 | length 8
  Bottom Layer w1: C8.1 C9.1 70.22,16.078 R27.1 R26.1 70.321,18.454 J3.1
NetC10_1: C10.1 C11.1 J5.1 R28.2 U2.28 | length 24.8
  Top Layer w0.2: U2.28 39.702,13.852 v3(39.753,13.8) ; J5.1 J5.1@40.665,12.226
  Top Layer w1: J5.1 42.073,10.048 55.604,10.048 R28.2
  Bottom Layer w1: v3(39.753,13.8) 39.753,13.258 40.665,12.346 J5.1 42.005,12.795 C10.1 C11.1
NetC12_1: C12.1 C17.2 L5.1 R12.2 | length 5.2
  Top Layer w1: C12.1 L5.1 R12.2 31.586,15.494 31.572,15.48 C17.2
NetC12_2: C12.2 C13.1 C18.2 L5.2 L6.1 | length 6.7
  Top Layer w1: C13.1 L6.1 L5.2 ; C18.2 28.016,15.367 28.03,15.381 L5.2 ; C12.2 L5.2
NetC13_2: C13.2 C14.1 C19.2 L6.2 L7.1 | length 6.7
  Top Layer w1: C14.1 L7.1 L6.2 ; C19.2 24.46,15.367 24.474,15.381 L6.2 ; C13.2 L6.2
NetC14_2: C14.2 C20.2 L7.2 T3.1 | length 5.5
  Top Layer w1: T3.1@18.724,14.605 20.791,14.605 L7.2 ; C14.2 L7.2 ; C20.2 20.918,16.119 L7.2
NetC15_1: C15.1 L8.1 R15.2 | length 2.8
  Top Layer w1: L8.1 R15.2 ; C15.1 R15.2@45.796,19.544
NetC15_2: C15.2 L4.1 R11.2 | length 3.3
  Top Layer w1: L4.1 R11.2 45.937,15.621 45.796,15.48 C15.2
NetC16_1: C16.1 L8.2 U2.5 | length 4.3
  Top Layer w0.2: U2.5@40.601,17.645 42.373,17.645 C16.1
  Top Layer w1: C16.1 42.748,18.81 42.889,18.669 L8.2
NetC16_2: C16.2 L4.2 U2.3 | length 4.3
  Top Layer w0.2: U2.3@40.601,16.645 42.373,16.645 C16.2
  Top Layer w1: C16.2 42.748,15.48 42.889,15.621 L4.2
NetC17_1: C17.1 C21.1 L9.1 R16.2 | length 4.9
  Top Layer w1: C21.1 L9.1 R16.2 31.586,18.542 31.572,18.556 C17.1
NetC18_1: C18.1 C21.2 C22.1 L9.2 L10.1 | length 6.4
  Top Layer w1: C22.1 L10.1 L9.2 ; C18.1 28.016,18.923 28.03,18.909 L9.2 ; C21.2 L9.2
NetC19_1: C19.1 C22.2 C23.1 L10.2 L11.1 | length 6.4
  Top Layer w1: C23.1 L11.1 L10.2 ; C19.1 24.46,18.556 24.474,18.542 L10.2 ; C22.2 L10.2
NetC20_1: C20.1 C23.2 L11.2 T3.3 | length 5.4
  Top Layer w1: T3.3@18.724,19.685 20.791,19.685 L11.2 ; C23.2 L11.2 ; C20.1 20.918,18.019 L11.2
NetC24_1: C24.1 T3.5 | length 2.8
  Top Layer w1: C24.1 12.873,17.094 T3.5@12.924,17.145
NetC25_1: C25.1 C26.1 J8.1 R31.2 U2.4 | length 21.4
  Top Layer w0.2: U2.4@40.601,17.145 U2.4 v3(44.272,17.145)
  Top Layer w1: J8.1 46.761,21.895 48.802,23.935 R31.2
  Bottom Layer w1: C25.1 C26.1 ; v3(44.272,17.145) 44.272,19.523 C26.1 ; J8.1 46.761,21.743 44.719,19.701 C26.1
NetC27_2: C27.2 C28.1 C29.1 C30.1 D1.K J9.1 U3.IN U4.IN
NetC31_2: C31.2 C32.1 FB2.2 R18.1 U3.OUT | length 6.9
  Top Layer w1: v3(39.37,35.738) 39.37,40.056 39.522,40.208
  Bottom Layer w1: v3(39.37,35.738) 39.37,34.585 FB2.2
NetC36_2: C36.2 C37.1 FB4.2 R33.1 U4.OUT | length 1.2
  Bottom Layer w1: v3(67.894,42.215) 67.954,42.215 FB4.2
NetC42_1: C42.1 C43.1 FB6.2 R41.1 U5.OUT
NetC56_1: C56.1 R12.1 U2.19 | length 4.2
  Top Layer w0.2: C56.1 33.979,16.645 U2.19@35.751,16.645
  Top Layer w1: R12.1 33.336,16.002 C56.1
NetC56_2: C56.2 R16.1 U2.17 | length 4
  Top Layer w0.2: C56.2 33.979,17.645 U2.17@35.751,17.645
  Top Layer w1: R16.1 33.336,18.288 C56.2
NetD2_K: D2.K R21.1 | length 2.6
  Top Layer w0.2: D2.K 19.313,53.04 R21.1
NetD3_A: D3.A J10.1 U5.IN
NetFB7_2: FB7.2 J11.12 | length 3.6
  Top Layer w0.2: J11.12@21.514,48.26 J11.12 22.758,49.2 FB7.2
NetJ2_1: J2.1 R4.1 | length 2.5
  Top Layer w1: J2.1 94.476,10.492 R4.1@95.733,11.749
NetJ6_1: J6.1 R22.2 | length 11.2
  Top Layer w1: J6.1@2.874,7.493 10.451,7.493 R22.2
NetJ7_1: J7.1 R23.2 | length 11.2
  Top Layer w1: J7.1 10.438,26.695 R23.2
NetJ11_1: J11.1 R35.2 | length 3
  Top Layer w0.2: R35.2 8.966,42.836 J11.1
NetJ11_2: J11.2 R36.1 | length 2.8
  Top Layer w0.2: R36.1 8.89,48.184 J11.2
NetJ11_3: J11.3 R37.2 | length 3
  Top Layer w0.2: R37.2 11.506,42.779 J11.3
NetJ11_4: J11.4 R38.1 | length 2.8
  Top Layer w0.2: R38.1 11.506,50.839 J11.4
NetJ11_5: J11.5 R39.2 | length 2.9
  Top Layer w0.2: R39.2 14.046,42.721 J11.5
NetJ11_6: J11.6 R40.1 | length 2.8
  Top Layer w0.2: R40.1 14.021,48.133 J11.6
NetJ11_7: J11.7 R42.2 | length 2.9
  Top Layer w0.2: R42.2 16.586,42.664 J11.7
NetJ11_8: J11.8 R43.1 | length 2.8
  Top Layer w0.2: J11.8 R43.1
NetJ11_9: J11.9 R44.2 | length 2.9
  Top Layer w0.2: J11.9 19.126,42.709 R44.2
NetJP1_1: JP1.1 R2.1 | length 3.3
  Bottom Layer w1: R2.1 75.63,7.925 JP1.1
NetJP1_2: JP1.2 U1.12 | length 14.5
  Top Layer w0.2: U1.12 75.082,15.469 75.895,14.656 v3(76.657,14.656)
  Bottom Layer w0.2: 75.844,11.481 74.346,12.979 74.346,14.249 74.752,14.656 v3(76.657,14.656) ; 76.65,11.362 77.002,11.01
  Bottom Layer w1: 75.844,11.481 77.394,9.931 78.461,9.931 JP1.2
NetJP2_1: JP2.1 R20.1 | length 2.3
  Top Layer w1.5: R20.1 77.876,25.756 JP2.1
NetL1_1: L1.1 R3.2 | length 1.3
  Top Layer w1: L1.1 R3.2
NetL3_1: L3.1 R8.2 | length 1.3
  Top Layer w1: L3.1 R8.2
NetR1_2: R1.2 R3.1 U1.3 | length 3.8
  Top Layer w0.2: R1.2 73.994,19.492 U1.3
  Top Layer w1: R3.1 72.466,20.738 72.466,21.02 R1.2
NetR4_2: R4.2 T1.1 | length 2.1
  Top Layer w1: T1.1@94.035,14.529 94.703,14.529 R4.2@95.733,13.499
NetR8_1: R8.1 R10.2 U1.10 | length 3.4
  Top Layer w0.2: R10.2 73.994,14.646 U1.10
  Top Layer w1: R8.1 73.087,14.021 R10.2
NetR9_1: R9.1 T1.3 | length 3.2
  Top Layer w1: T1.3@94.035,19.609 94.089,19.662 R9.1@94.089,22.816
NetR13_1: R13.1 R23.1 T3.4 | length 4.8
  Top Layer w1: R13.1 12.93,22.454 R23.1 13.005,19.766 T3.4@12.924,19.685
NetR14_1: R14.1 R17.1 R25.2 | length 3
  Top Layer w1: R25.2 49.606,17.196 ; R14.1 49.606,17.196 ; R17.1 49.682,17.12 49.606,17.196
NetR18_2: R18.2 R19.1 U3.GND | length 1.7
  Top Layer w1: R19.1 R18.2
NetR22_1: R22.1 R24.2 T3.6 | length 4.9
  Top Layer w1: R24.2 11.059,11.797 R22.1 13.005,14.524 T3.6@12.924,14.605
NetR26_2: R26.2 U1.4 | length 2.4
  Top Layer w0.2: v3(72.644,18.923) 72.898,18.669 U1.4
  Bottom Layer w0.2: R26.2 72.071,18.35 v3(72.644,18.923)
NetR27_2: R27.2 U1.9 | length 2.4
  Top Layer w0.2: v3(72.644,15.062) 72.974,15.392 72.974,15.418 73.443,15.418 U1.9
  Bottom Layer w0.2: R27.2 72.071,15.635 v3(72.644,15.062)
NetR33_2: R33.2 R34.1 U4.GND
NetR41_2: R41.2 R45.1 U5.GND
STROBE: R42.1 U2.7 | length 38.6
  Top Layer w0.2: R42.1 17.05,40.438 17.05,36.529 17.403,36.176 25.432,36.176 34.874,26.734 v3(34.874,26.264) ; v7(40.386,21.895) 40.894,21.387 40.919,21.387 41.317,20.989 41.317,19.335 U2.7
  Bottom Layer w0.2: v3(34.874,26.264) 34.835,26.225 34.835,25.563 37.66,22.738 38.845,22.738 39.688,21.895 v7(40.386,21.895)
V+_AMP1: C38.1 C39.1 C40.1 C47.1 C48.1 C49.1 FB1.1 FB4.1 R2.2 R32.1 U1.5 U1.6 U1.7 U1.8 | length 52.6
  Top Layer w1: R32.1 59.639,29.251 FB1.1 v3(61.062,29.235) 61.29,29.235 65.405,25.121 70.46,25.121 74.219,21.361 74.27,21.361 v3(74.27,21.311)
  Bottom Layer w0.2: 71.476,15.291 71.697,15.291 72.041,14.947 72.041,14.812 72.394,14.459 73.352,14.459 73.943,13.868 ; v3(74.27,21.311) 74.27,18.644 74.841,18.072 74.894,18.072 75.311,17.655 75.311,16.281 74.566,15.536 73.996,15.536 73.943,15.483 73.943,13.868 ; 74.295,11.01 73.943,11.362 73.943,13.868
  Bottom Layer w1: v3(61.062,29.235) 61.062,31.775 62.671,33.385 C38.1 C39.1 C40.1 68.702,34.498 68.702,35.072 ; 68.732,34.528 68.732,35.041 68.702,35.072 ; FB4.1 68.702,39.407 68.702,35.072 ; 74.295,11.01 R2.2
  other v1: 71.247,15.494
V+_AMP2: C33.1 C34.1 C35.1 C50.1 C51.1 C52.1 FB1.2 FB2.1 R29.2 U2.2 U2.6 U2.11 U2.16 U2.20 U2.25 | length 41.3
  Top Layer w1: C50.1 39.803,22.852 41.165,22.852 42.316,24.003 42.316,25.393 48.086,31.162 50.546,31.162 ; v3(50.587,33.664) 50.587,31.204 50.546,31.162 ; FB1.2 55.016,29.235 53.089,31.162 50.546,31.162
  Bottom Layer w1: v1(34.595,15.011) v3(34.595,19.558) ; v3(35.382,11.85) 35.382,11.756 36.786,10.352 R29.2 ; FB2.1 44.167,33.706 C35.1 C34.1 C33.1 v3(50.587,33.664)
VDD_FPGA: J11.11 R32.2 | length 45.6
  Top Layer w1.5: J11.11 21.666,44.552 27.254,38.964 v3(37.49,38.964) ; v3(54.432,38.964) 56.642,38.964 59.639,35.966 R32.2
  Bottom Layer w1.5: v3(37.49,38.964) v3(54.432,38.964)
VS+_EXT: C44.1 C45.1 C46.1 FB6.1 JP2.3 | length 57.8
  Top Layer w1.5: v3(78.13,47.168) 79.705,48.743 79.705,52.553 81.509,54.356 94.574,54.356 FB6.1 ; JP2.3 85.395,28.092 85.395,33.325 v3(85.039,33.68)
  Bottom Layer w1.5: v3(78.13,47.168) 78.13,44.526 76.378,42.774 76.378,36.331 C44.1 ; C46.1 C45.1 C44.1 ; v3(85.039,33.68) 79.061,33.68 C44.1
VS-: C53.1 C54.1 C55.1 JP2.2 pad.0 U1.13 U1.14 U1.15 U1.16 | length 14
  Top Layer w1: v3(75.54,21.514) 78.027,24.002 78.764,24.002 JP2.2
  Bottom Layer w0.2: v3(75.54,21.514) 74.905,20.879 74.905,19.228 75.794,18.339 77.546,18.339 pad.0
pads on no net: J11.13 J11.14 J11.15 J11.16 J11.17 J11.18 J11.19 J11.20 T1.2 T2.2 T3.2 U1.1

## Polygon pours and split planes (outlines as drawn)
V+_AMP2 on Top Layer "Top Layer-No Net 1" (solid, remove dead copper, pour order 40): 39.929,16.383 41.885,16.383 42.088,16.18 42.088,14.072 39.319,11.303 35.128,11.303 34.214,12.217 34.214,15.9 34.696,16.383 36.347,16.383 36.347,15.875 39.903,15.875 39.929,15.9
GND on Top Layer "GND AMP2" (solid, remove dead copper, pour order 35): 35.052,15.951 35.052,15.316 36.297,14.072 37.744,14.072 37.935,14.263 37.935,15.633 37.617,15.951
V+_AMP2 on Top Layer "V+AMP2" (solid, remove dead copper, pour order 44): 40.157,22.962 35.763,22.962 33.96,21.158 33.96,18.288 34.341,17.907 41.834,17.907 42.139,18.212 42.139,20.98 40.157,22.962
VS- on Top Layer "Top Layer-No Net" (solid, pour order 37): 79.832,14.287 78.562,14.275 75.514,16.18 75.514,17.958 78.562,19.863 79.832,19.863
V+_AMP1 on Top Layer "Top Layer-No Net" (solid, pour order 38): 72.974,16.18 69.926,14.275 68.656,14.275 68.656,19.863 69.926,19.863 72.974,17.958
NetC36_2 on Top Layer "GND AMP2" (solid, remove dead copper, pour order 36): 73,40.589 71.704,40.589 71.425,40.31 71.272,40.157 71.272,36.627 70.79,36.144 68.377,36.144 67.691,36.83 67.691,41.707 66.04,43.358 64.084,43.358 64.084,45.974 65.989,47.879 67.081,47.879 73,41.961
NetR33_2 on Top Layer "GND AMP2" (solid, remove dead copper, pour order 39): 71.73,37.262 73.05,37.262 73.838,38.049 73.838,41.148 77.165,44.475 77.165,45.568 76.937,45.796 73.457,45.796 73.152,45.491 72.746,45.085 72.746,42.596 73,42.342 73,40.589 72.339,40.589 71.73,39.98
GND3 on Top Layer "GND" (solid, remove dead copper, pour order 43): 66.904,41.808 65.684,41.808 63.856,39.98 63.652,39.776 63.652,36.22 66.218,36.22 67.31,35.128 72.568,35.128 73.076,35.636 73.076,36.474 72.847,36.703 71.679,36.703 70.993,36.017 68.224,36.017 67.488,36.754 67.488,41.275 66.954,41.808
GND3 on Top Layer "GND3" (solid, remove dead copper, pour order 49): 41.046,36.83 47.981,36.83 49.047,35.763 50.14,35.763 50.521,35.382 50.521,34.569 49.174,33.223 43.002,33.223 41.046,35.179
NetC31_2 on Top Layer "Alimentació preamp 2" (solid, remove dead copper, pour order 50): 38.837,50.14 38.837,39.573 40.919,37.49 46.888,37.49 47.498,38.1 47.498,48.717 46.076,50.14
NetC31_2 on Top Layer "Alimentació preamp 2" (solid, remove dead copper, pour order 51): 50.47,40.818 49.403,41.885 48.158,41.885 47.168,42.875 46.025,42.875 46.025,38.354 46.888,37.49 47.955,37.49 48.793,38.329 48.793,39.014 49.555,39.776 50.343,39.776 50.47,39.903
NetR18_2 on Top Layer "FB preamp 2" (solid, remove dead copper, pour order 52): 49.276,39.091 49.784,39.599 50.571,39.599 50.673,39.7 50.673,41.021 48.743,42.951 48.743,43.79 52.121,43.79 52.908,43.002 52.908,38.71 50.546,36.347 49.657,36.347 49.276,36.728
NetR41_2 on Top Layer "V-" (solid, remove dead copper, pour order 53): 78.867,40.411 80.366,40.411 82.271,38.506 83.363,38.506 83.464,38.608 83.464,42.57 82.829,43.205 82.702,43.332 78.867,43.332
NetC42_1 on Top Layer "V-" (solid, remove dead copper, pour order 54): 78.765,43.739 88.138,43.739 91.059,46.66 91.923,47.523 93.701,47.523 97.587,47.523 98.349,48.285 98.349,51.156 97.765,51.74 81.483,51.74 81.128,51.384 81.128,47.371 78.765,45.009
V+_AMP2 on Top Layer "V+" (solid, pour order 55): 40.157,22.962 40.564,22.962 42.139,21.387 42.139,20.855
NetD3_A on Top Layer "VIN" (solid, remove dead copper, pour order 57): 96.266,35.814 95.529,35.077 85.954,35.077 85.649,35.382 85.649,37.998 85.649,41.275 86.792,42.418 89.103,42.418 92.227,39.294 92.431,39.091 96.012,39.091 96.291,39.091 96.926,38.456 96.926,36.957 96.926,36.474 96.266,35.814
GND3 on Top Layer "VIN" (solid, remove dead copper, pour order 58): 98.146,47.193 92.431,47.193 91.44,46.203 90.526,45.288 90.526,41.656 92.837,39.345 96.139,39.345 97.13,39.345 98.298,40.513 98.806,41.021 98.806,45.695 98.806,46.533 98.146,47.193
GND3 on Top Layer "VIN" (solid, pour order 59): 90.526,41.656 90.399,41.783 89.916,41.783 89.56,41.783 88.494,42.85 88.494,43.815 89.662,44.983 89.687,44.958 90.119,44.958 90.195,44.958 90.526,45.288
NetC27_2 on Top Layer "VIN" (solid, remove dead copper, pour order 45): 40.284,56.032 40.284,52.934 42.57,50.648 42.799,50.419 46.507,50.419 46.812,50.419 48.057,49.174 48.057,47.32 48.438,46.939 52.502,46.939 52.934,47.371 53.899,48.336 60.96,48.336 62.789,50.165 62.789,51.41 64.059,52.68 71.247,52.68 72.314,51.613 72.314,49.632 73.304,48.641 77.394,48.641 77.851,49.098 77.851,51.308 77.851,53.391 77.114,54.127 61.519,54.127 59.741,52.349 45.263,52.349 43.967,53.645 43.967,55.728 42.824,56.871 41.123,56.871 40.284,56.032
GND3 on Top Layer "VIN" (solid, remove dead copper, pour order 48): 45.364,54.254 45.364,55.626 47.142,57.404 58.217,57.404 59.233,56.388 59.233,52.832 45.364,52.832
GND3 on Top Layer "gnd3" (solid, remove dead copper, pour order 61): 49.047,35.763 54.483,35.763 55.296,34.95 55.296,33.325 54.915,32.944 52.654,32.944 51.359,34.239 51.029,34.569 50.521,34.569
GND1 on Top Layer "TOP_IMP_GND1" (solid, remove dead copper, pour order 42): 68.275,32.258 60.909,32.258 59.487,30.836 59.487,5.055 61.519,3.023 91.186,3.023 92.405,4.242 92.405,28.804 88.951,32.258
GND on Top Layer "TOP_GND_POLY" (solid, remove dead copper, pour order 47): 58.369,30.861 56.845,32.385 21.234,32.385 18.466,32.385 17.018,30.937 17.018,4.699 18.821,2.896 56.439,2.896 58.369,4.826
GND3 on Top Layer "gnd3" (solid, remove dead copper, pour order 68): 90.322,2.769 91.338,2.769 92.634,4.064 92.634,15.545 93.066,15.977 99.111,15.977 99.492,15.596 99.492,0.635 99.085,0.229 88.875,0.229 88.697,0.406
GND3 on Top Layer "VIN" (solid, remove dead copper, pour order 56): 0.559,9.296 8.814,9.296 10.058,10.541 10.058,23.952 8.814,25.197 8.687,25.07 0,25.07 0,9.398 -0.051,9.347
GND1 on Bottom Layer "GND1" (solid, pour order 41): 68.275,32.258 60.909,32.258 59.487,30.836 59.487,5.055 61.519,3.023 91.186,3.023 92.405,4.242 92.405,28.804 88.951,32.258
GND on Bottom Layer "GND" (solid, remove dead copper, pour order 46): 58.369,30.861 56.845,32.385 21.234,32.385 18.466,32.385 17.018,30.937 17.018,4.699 18.821,2.896 56.439,2.896 58.369,4.826
GND3 on Bottom Layer "VIN" (solid, remove dead copper, pour order 60): 92.608,4.064 91.288,2.743 88.722,2.743 88.722,0.33 88.773,0.279 88.824,0.229 92.659,0.229
GND3 on Bottom Layer "gnd3" (solid, remove dead copper, pour order 62): 37.973,58.903 35.636,58.903 35.103,58.369 35.103,50.978 33.503,49.378 33.503,33.452 34.265,32.69 56.769,32.69 58.699,34.62 58.699,56.667 56.464,58.903
GND3 on Bottom Layer "gnd3" (solid, remove dead copper, pour order 63): 58.699,51.664 59.487,50.876 59.487,34.595 61.341,32.741 71.196,32.741 73.838,32.741 75.463,34.366 75.463,43.053 77.267,44.856 77.267,47.6 78.588,48.92 78.588,57.48 77.114,58.953 60.985,58.953 58.699,56.667
GND3 on Bottom Layer "gnd3" (solid, remove dead copper, pour order 64): 78.588,48.92 79.172,48.336 79.172,44.272 76.911,42.012 76.911,36.297 79.959,33.249 84.658,33.249 85.395,32.512 88.341,32.512 93.421,32.512 96.926,36.017 96.926,53.518 94.691,55.753 78.537,55.753 78.486,55.702
GND3 on Bottom Layer "gnd3" (solid, remove dead copper, pour order 65): 91.288,2.743 92.634,4.089 92.634,20.93 92.634,28.804 95.707,31.877 95.707,34.341 97.079,35.712 97.231,35.865 97.231,39.827 97.231,53.696 94.767,56.159 78.588,56.159 77.114,57.633 77.114,58.953 98.628,58.953 99.416,58.166 99.441,58.141 99.441,57.175 99.441,0.61 99.111,0.279 99.06,0.229 91.44,0.229
GND3 on Bottom Layer "gnd3" (solid, pour order 66): 56.464,58.903 60.935,58.903 60.985,58.953 58.699,56.667
GND3 on Bottom Layer "gnd3" (solid, remove dead copper, pour order 67): 0.178,0.889 0.914,0.152 6.02,0.152 10.338,0.152 14.986,4.801 14.986,36.322 17.399,38.735 19.66,38.735 21.209,37.186 21.209,33.833 22.301,32.741 32.106,32.741 32.868,33.503 32.868,49.708 35.128,51.968 35.128,58.395 35.636,58.903 0.635,58.903 0.152,58.42

## Silkscreen, mask and mechanical layers (free items; w line width, h text height)
Top Overlay:
  text "Partial Discharge Preamp v1.0" at 6.909,0.991 h1.52
  text "54538 9.9x5.6" at 55.728,0.889 h1.52
Mechanical 1:
  the board outline again, w0.254
Mechanical 15:
  lines w0.1: 97.368,45.52 95.418,45.52 95.418,49.12 97.368,49.12